# EAGLE board greenhousectrl-latest-expanded (EAGLE 7.7.0)
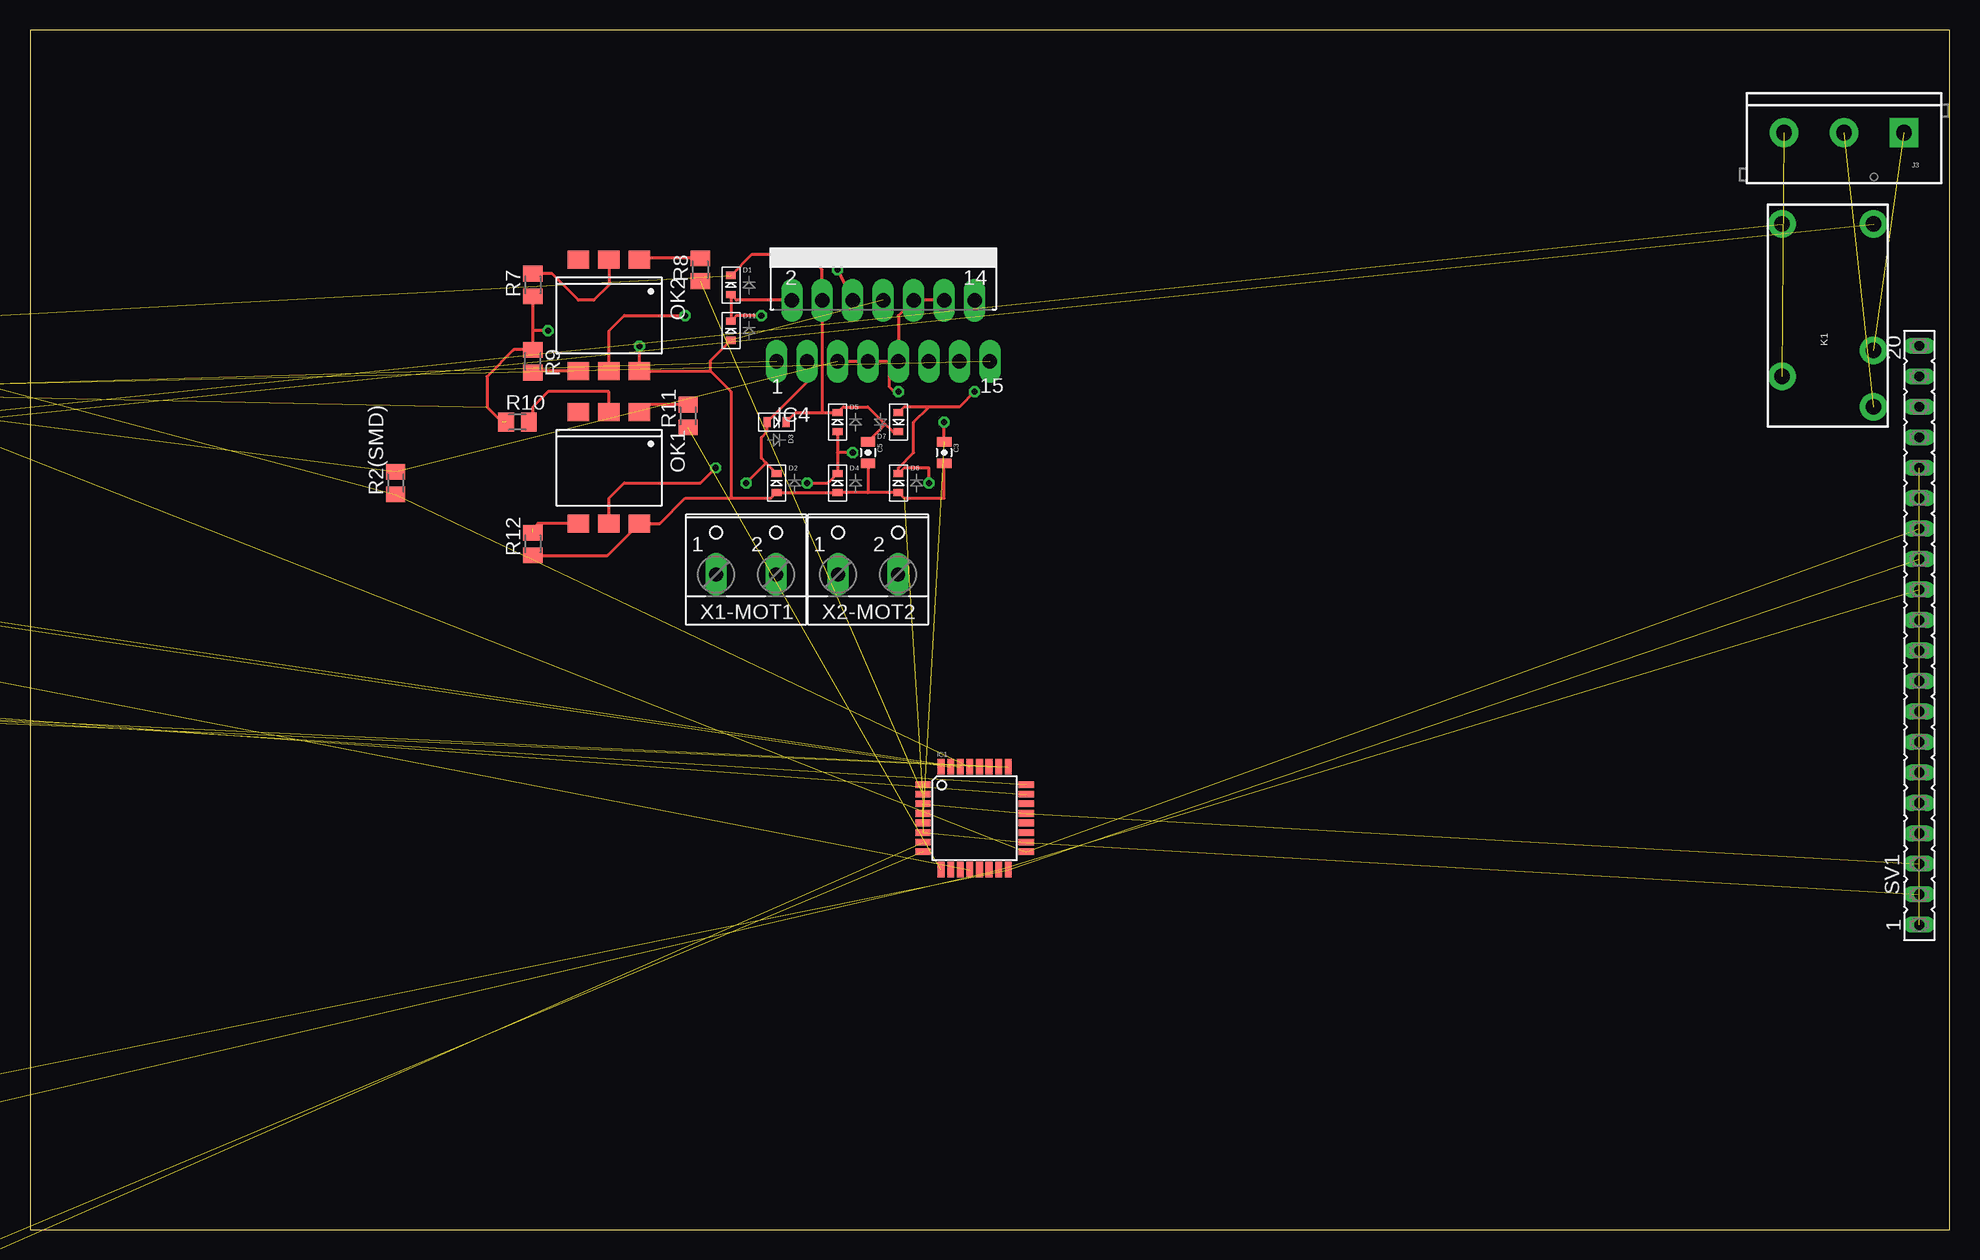
[diagram p0: board, top side]
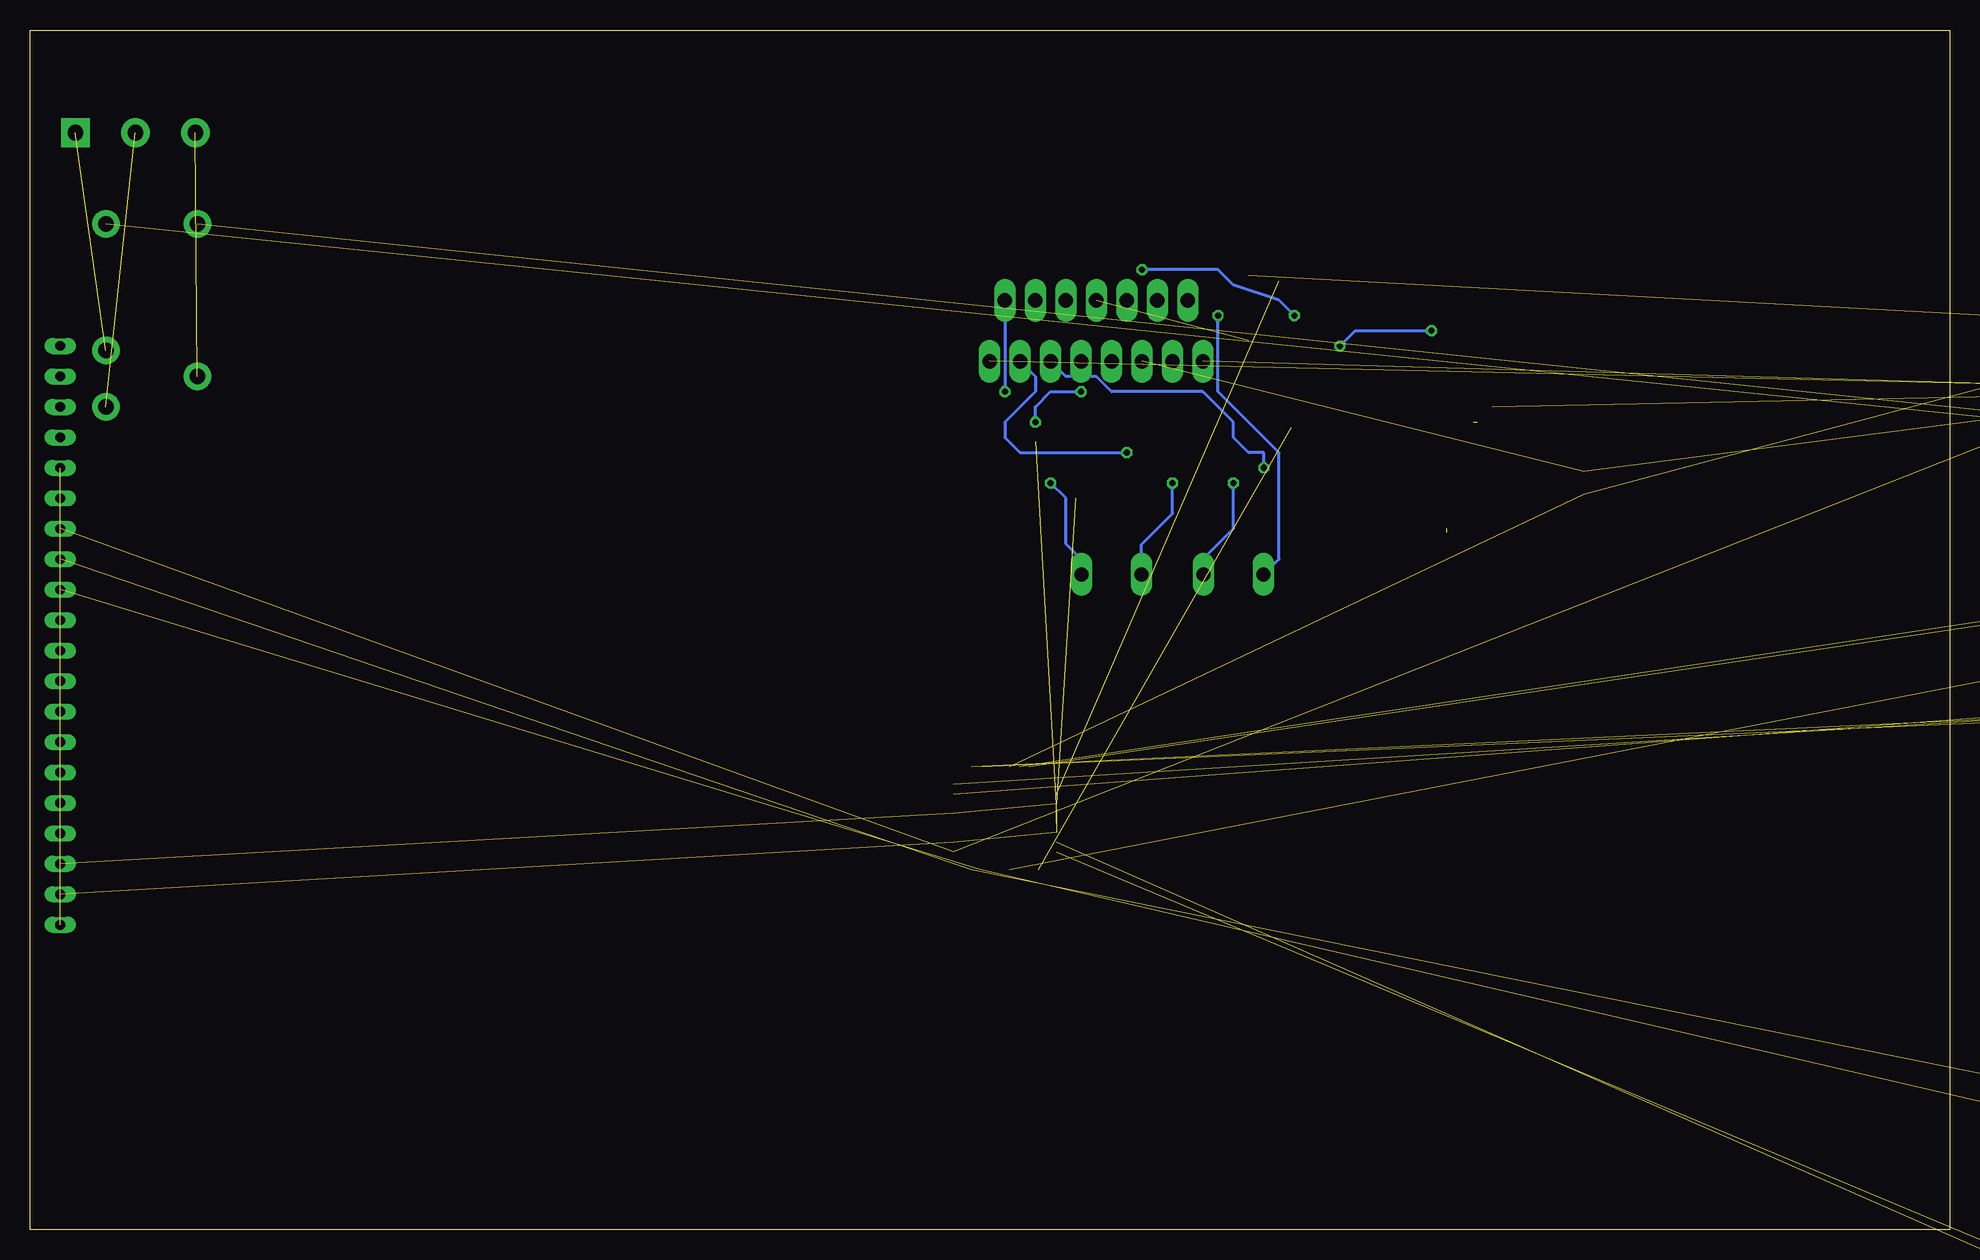
[diagram p1: board, bottom side, seen from below]

Size 160 x 100 mm. Coordinates in mm from the lower left corner, seen from the top.
Outline: 0,0 160,0 160,100 0,100 0,0
Copper layers (1*16): Top 0.035mm / dielectric 1.5mm / Bottom 0.035mm
Design rules "default": minimum track width 10mil, minimum drill 24mil, track to track 8mil, track to pad 8mil, pad to pad 8mil, via to via 8mil, smd to smd 8mil, copper to edge 40mil, drill to drill 8mil, minimum pad ring 10mil, minimum via ring 8mil, stop-mask expansion 4mil, vias tented up to drill 0mil, thermal gap 10mil

## Footprints (pad centres in the part's own frame; a part is rotated, then mirrored left to right if it is on the bottom)
C0805 = smd 1.3 x 1.5: 1 -0.95,0; 2 0.95,0
0805-CAP = smd 0.8 x 1.2: 1 -0.9,0; 2 0.9,0
0603-CAP = smd 1.1 x 1: 1 -0.85,0; 2 0.85,0
SOD-523 = smd 0.8 x 0.6: A 0,-0.8; K 0,0.8
SOD-323F = smd 1 x 0.8: A -1,0; C 1,0
06X1-PTH = drill 1.016 octagon: 1 -6.35,0; 2 -3.81,0; 3 -1.27,0; 4 1.27,0; 5 3.81,0; 6 6.35,0
TQFP32-08 = smd 1.27 x 0.559: 1 -4.293,2.8; 2 -4.293,2; 3 -4.293,1.2; 4 -4.293,0.4; 5 -4.293,-0.4; 6 -4.293,-1.2; 7 -4.293,-2; 8 -4.293,-2.8; 17 4.293,-2.8; 18 4.293,-2; 19 4.293,-1.2; 20 4.293,-0.4; 21 4.293,0.4; 22 4.293,1.2; 23 4.293,2; 24 4.293,2.8 | smd 0.559 x 1.27: 9 -2.8,-4.293; 10 -2,-4.293; 11 -1.2,-4.293; 12 -0.4,-4.293; 13 0.4,-4.293; 14 1.2,-4.293; 15 2,-4.293; 16 2.8,-4.293; 25 2.8,4.293; 26 2,4.293; 27 1.2,4.293; 28 0.4,4.293; 29 -0.4,4.293; 30 -1.2,4.293; 31 -2,4.293; 32 -2.8,4.293
MULTIWATT-15 = drill 1.2 long: 1 -8.89,-7.62; 2 -7.62,-2.54; 3 -6.35,-7.62; 4 -5.08,-2.54; 5 -3.81,-7.62; 6 -2.54,-2.54; 7 -1.27,-7.62; 8 0,-2.54; 9 1.27,-7.62; 10 2.54,-2.54; 11 3.81,-7.62; 12 5.08,-2.54; 13 6.35,-7.62; 14 7.62,-2.54; 15 8.89,-7.62
AVRISP = drill 0.9 pad 1.626: 1 -1.27,2.54; 2 1.27,2.54; 3 -1.27,0; 4 1.27,0; 5 -1.27,-2.54; 6 1.27,-2.54
POWER_JACK_PTH = drill 2.997 pad 4.318: GND 0,7.7; GNDBREAK 4.7,10.7; PWR 0,13.7
SCREWTERMINAL-5MM-3 = drill 1.3 pad 2.413 square: 1 0,0 | drill 1.3 pad 2.413: 2 5,0; 3 10,0
PAD-JUMPER-2-NO_YES_SILK = smd 0.635 x 1.27: 1 -0.45,0; 2 0.45,0
RELAY-JZC = drill 1.3 pad 2.286: 1 3.81,-8.89; 2 -3.81,1.651; 3 -3.81,6.35; 4 3.81,3.81; 5 -3.81,-8.89
SOT23 = smd 1 x 1.4: 1 -0.95,-1.1; 2 0.95,-1.1; 3 0,1.1
DIL6-SMD = smd 1.78 x 1.52: 1 -2.54,-4.645; 2 0,-4.645; 3 2.54,-4.645; 4 2.54,4.645; 5 0,4.645; 6 -2.54,4.645
SOT23-3 = smd 0.8 x 0.9: 1 -0.95,-1; 2 0.95,-1; 3 0,1.1
M0805 = smd 1.3 x 1.6: 1 -0.95,0; 2 0.95,0
0402-RES = smd 0.85 x 0.9: 1 -0.58,0; 2 0.58,0
03P = drill 0.914 long: 1 -2.54,0; 2 0,0; 3 2.54,0
FE20 = drill 0.813 long: 1 -24.13,0; 2 -21.59,0; 3 -19.05,0; 4 -16.51,0; 5 -13.97,0; 6 -11.43,0; 7 -8.89,0; 8 -6.35,0; 9 -3.81,0; 10 -1.27,0; 11 1.27,0; 12 3.81,0; 13 6.35,0; 14 8.89,0; 15 11.43,0; 16 13.97,0; 17 16.51,0; 18 19.05,0; 19 21.59,0; 20 24.13,0
BTN_CK_KSS = smd 1.7 x 3.7: P$1 -2.95,0; P$2 2.95,0
SOT223 = smd 1.219 x 2.235: 1 -2.311,-3.099; 2 0,-3.099; 3 2.311,-3.099 | smd 3.6 x 2.2: 4 0,3.099
HC49 = drill 0.813 pad 1.8: 1 -2.413,0; 2 2.413,0
W237-102 = drill 1.194 long: 1 -2.5,-1.27; 2 2.5,-1.27

## Placement (x,y rotation side)
C1  [C0805]  -68.58,-35.56 0 top  (outside the outline)
C2  [C0805]  -68.58,-40.64 0 top  (outside the outline)
C3  1.0uF  [0805-CAP]  76.2,64.77 270 top
C4  0.1uF  [0603-CAP]  -21.59,74.93 0 top  (outside the outline)
C5  1.0uF  [0805-CAP]  69.85,64.77 270 top
C6  0.1uF  [0603-CAP]  -25.4,74.93 0 top  (outside the outline)
C7  0.1uF  [0603-CAP]  -29.21,74.93 0 top  (outside the outline)
D1  [SOD-523]  58.42,78.74 0 top
D2  [SOD-523]  62.23,62.23 0 top
D3  [SOD-523]  62.23,67.31 270 top
D4  [SOD-523]  67.31,62.23 0 top
D5  [SOD-523]  67.31,67.31 0 top
D6  [SOD-523]  72.39,62.23 0 top
D7  [SOD-523]  72.39,67.31 180 top
D9  1N4148  [SOD-323F]  -20.32,66.04 0 top  (outside the outline)
D10  Zener  [SOD-323F]  -25.4,66.04 0 top  (outside the outline)
D11  [SOD-523]  58.42,74.93 0 top
FTDI-SERIAL-HEADER  HEADER-06X1-MALE  [06X1-PTH]  -24.13,53.34 0 top  (outside the outline)
IC1  ATMEGA168TQFP-08  [TQFP32-08]  78.74,34.29 0 top
IC4  L298  [MULTIWATT-15]  71.12,80.01 0 top
ICSP-PROG-HEADER  AVRISP-6  [AVRISP]  -27.94,5.08 0 top  (outside the outline)
J1  POWER_JACKPTH  [POWER_JACK_PTH]  -59.69,7.62 180 top  (outside the outline)
J3  [SCREWTERMINAL-5MM-3]  156.21,91.44 180 top
JP1  JUMPER-PAD-2-NOYES_SILK  [PAD-JUMPER-2-NO_YES_SILK]  -35.56,66.04 0 top  (outside the outline)
K1  RELAYPTH4  [RELAY-JZC]  149.86,74.93 180 top
LD1  PL006-WCR12  [SOT23]  -50.8,36.83 0 top  (outside the outline)
LD2  PL006-WCR12  [SOT23]  -63.5,36.83 0 top  (outside the outline)
LED1  PL006-WCR13  [SOT23]  -22.86,45.72 0 top  (outside the outline)
OK1  4N27SM  [DIL6-SMD]  48.26,63.5 180 top
OK2  4N27SM  [DIL6-SMD]  48.26,76.2 180 top
Q1  MMBT2222A  [SOT23-3]  -44.45,64.77 0 top  (outside the outline)
R1  [M0805]  -15.24,69.85 0 top  (outside the outline)
R2  [M0805]  -20.32,69.85 0 top  (outside the outline)
R2(SMD)  [M0805]  30.48,62.23 90 top
R3  1K  [M0805]  -43.18,53.34 0 top  (outside the outline)
R4  1K  [M0805]  -48.26,53.34 0 top  (outside the outline)
R5  [M0805]  -25.4,69.85 0 top  (outside the outline)
R6  [M0805]  -30.48,69.85 0 top  (outside the outline)
R7  [M0805]  41.91,78.74 90 top
R8  [M0805]  55.88,80.01 90 top
R9  [M0805]  41.91,72.39 270 top
R10  [M0805]  40.64,67.31 0 top
R11  [M0805]  54.86,67.82 90 top
R12  [M0805]  41.91,57.15 90 top
R13  [0402-RES]  -33.02,73.66 0 top  (outside the outline)
R14  [0402-RES]  -36.83,73.66 0 top  (outside the outline)
SL1  [03P]  -29.21,44.45 0 top  (outside the outline)
SL2  [03P]  -38.1,44.45 0 top  (outside the outline)
SL3  [03P]  -46.99,44.45 0 top  (outside the outline)
SL4  [03P]  -55.88,44.45 0 top  (outside the outline)
SV1  [FE20]  157.48,49.53 90 top
SW1  [BTN_CK_KSS]  -36.83,52.07 0 top  (outside the outline)
U2  V_REG_317SMD  [SOT223]  -49.53,24.13 0 top  (outside the outline)
X1  CRYSTALS-NOGND-HC49  [HC49]  -64.77,-27.94 0 top  (outside the outline)
X1-MOT1  [W237-102]  59.69,55.88 0 top
X2-MOT2  [W237-102]  69.85,55.88 0 top

## Library data of the parts
C1 C2 = resistor
C3 C5 = SparkFun-Capacitors; PROD_ID: CAP-11625
C4 C6 C7 = SparkFun-Capacitors; PROD_ID: CAP-00810
D1-D7 D10 D11 ICSP-PROG-HEADER R1 R2 R2(SMD) R3-R12 SW1 = adafruit
D9 = adafruit; PROD_ID: DIO-08378
FTDI-SERIAL-HEADER = GeekAmmo; OTHER: 4UCON 00834; URL: http://www.4uconnector.com/online/SearchPro.asp?FormName=ProSearch&FormAction=search&s_GroupNo=&s_keyword=00834
IC1 = atmega328p
IC4 = st-microelectronics; MPN: L298N; OC_FARNELL: 1589425; OC_NEWARK: 32M1527
J1 = SparkFun-Connectors; PROD_ID: CONN-08197
J3 = SparkFun-Connectors; PROD_ID: CONN-10134; STOREFRONT_ID: PRT-08433
JP1 = SparkFun-Passives
K1 = SparkFun-Electromechanical
LD1 LD2 = led
LED1 = led; PROD_ID: DIO-09529
OK1 OK2 = optocoupler; MF: FAIRCHILD SEMICONDUCTOR; MPN: 4N27S-M; OC_FARNELL: unknown; OC_NEWARK: 05C3300
Q1 = SparkFun-DiscreteSemi; PROD_ID: TRANS-08049
R13 R14 = SparkFun-Resistors
SL1-SL4 = con-amp-quick; OC_FARNELL: unknown; OC_NEWARK: unknown
SV1 = con-lsta; OC_FARNELL: unknown; OC_NEWARK: unknown
U2 = SparkFun-PowerIC
X1 = IQD-Frequency-Products
X1-MOT1 X2-MOT2 = con-wago-500; MPN: 237-102; OC_FARNELL: unknown; OC_NEWARK: 70K9898

## Nets
+5V: C3.1 C7.1 FTDI-SERIAL-HEADER.3 IC1.4 IC1.6 IC1.18 IC4.5 IC4.7 IC4.9 IC4.10 IC4.12 ICSP-PROG-HEADER.2 R2(SMD).2 R2.1 R14.2 SL1.2 SL2.2 SL3.2 SL4.2 SV1.2 SV1.15 U2.2
+12V: C5.1 C6.1 D1.K D3.K D5.K D7.K IC4.4 J1.PWR U2.3
ADC4: SV1.4
ADC5: SV1.5
COIL: D10.C JP1.1 K1.1 Q1.3 R4.1
COMMON: J3.3 K1.4
CTS(DOESNTEXIST): FTDI-SERIAL-HEADER.2
DIODENODE: D9.A D10.A JP1.2
DTR: C4.1 FTDI-SERIAL-HEADER.6
ENA: IC4.6 OK2.5
ENB: IC4.11 OK1.5
GND: C1.1 C2.1 C3.2 C5.2 C6.2 C7.2 D2.A D4.A D6.A D11.A FTDI-SERIAL-HEADER.1 IC1.3 IC1.5 IC1.21 IC4.8 ICSP-PROG-HEADER.6 J1.GND J1.GNDBREAK LD1.3 LD2.3 OK1.6 OK2.6 Q1.2 R5.2 R6.2 R7.1 R9.1 R10.1 R12.1 R13.1 SL1.1 SL2.1 SL3.1 SL4.1 SV1.1 SV1.3 SV1.16 SW1.P$2
MISO: IC1.16 ICSP-PROG-HEADER.1 SV1.13
MOSI: IC1.15 ICSP-PROG-HEADER.4 SV1.12
N$1: OK2.1 R8.2
N$2: LD2.1 R2.2
N$3: LED1.3 R4.2
N$4: OK2.2 R7.2
N$5: OK2.4 R9.2
N$6: Q1.1 R3.1
N$7: R13.2 R14.1 U2.1
N$8: OK1.1 R11.2
N$9: OK1.2 R10.2
N$10: LD1.1 R1.1
N$11: C1.2 IC1.7 X1.2
N$13: C2.2 IC1.8 X1.1
N$15: OK1.4 R12.2
NC: J3.1 K1.2
NO: J3.2 K1.3
OUT1: D1.A D11.K IC4.2 X1-MOT1.1
OUT2: D2.K D3.A IC4.3 X1-MOT1.2
OUT3: D4.K D5.A IC4.13 X2-MOT2.1
OUT4: D6.K D7.A IC4.14 X2-MOT2.2
PB0: IC1.12 R3.2
PB1: IC1.13
PB2: IC1.14
PC0: IC1.23 SL1.3
PC1: IC1.24 SL2.3
PC2: IC1.25 SL3.3
PC3: IC1.26 SL4.3
PC4: IC1.27
PC5: IC1.28
PD2: IC1.32
PD3: IC1.1
PD4: IC1.2 R8.1
PD5: IC1.9 R11.1
PD6: IC1.10
PD7: IC1.11
RST: C4.2 IC1.29 ICSP-PROG-HEADER.5 R2(SMD).1 SW1.P$1
RX: FTDI-SERIAL-HEADER.5 IC1.30
SCK: IC1.17 ICSP-PROG-HEADER.3 R1.2 SV1.14
SEN_A: IC4.1 R5.1
SEN_B: IC4.15 R6.1
SS: SV1.11
TX: FTDI-SERIAL-HEADER.4 IC1.31
VCC: D9.C K1.5 LED1.1

## Tracks (layer width: path | path; a pad name or v marks a point on that pad's centre or on a via)
+5V  (via drill 0.51)  (16 unrouted)
  Top 0.254: C3.1 v76.2,67.31 | v72.39,69.85 72.01,69.85 71.63,70.23 71.63,71.63 IC4.9 | IC4.9 72.39,76.2 IC4.10 IC4.12 | IC4.9 IC4.7 IC4.5
  Bottom 0.254: v76.2,67.31 76.2,68.58 74.93,69.85 v72.39,69.85
+12V  (3 unrouted)
  Top 0.254: D1.K 60.16,81.28 64.77,81.28 66.04,80.01 IC4.4 66.04,68.11 | D3.K 63.83,68.11 66.04,68.11 | 66.04,68.11 D5.K 67.78,68.58 69.85,68.58 71.12,67.31 | 71.12,67.31 71.92,66.51 D7.K | C5.1 71.12,66.94 71.12,67.31
COIL  (4 unrouted)
COMMON  (1 unrouted)
DIODENODE  (2 unrouted)
DTR  (1 unrouted)
ENA  (via drill 0.51)
  Top 0.254: OK2.5 48.26,74.93 49.53,76.2 v54.61,76.2 | v67.31,80.01 IC4.6
  Bottom 0.254: v54.61,76.2 55.88,77.47 59.69,78.74 60.96,80.01 v67.31,80.01
ENB  (via drill 0.51)
  Top 0.254: OK1.5 48.26,60.96 49.53,62.23 55.88,62.23 v57.15,63.5
  Bottom 0.254: v57.15,63.5 57.15,64.77 58.42,64.77 59.69,66.04 59.69,67.31 62.23,69.85 69.85,69.85 71.12,71.12 73.66,71.12 IC4.11
GND  (via drill 0.51)  (27 unrouted)
  Top 0.254: R7.1 41.91,74.93 | 41.91,74.93 R9.1 40.32,73.34 38.1,71.12 38.1,68.58 39.37,67.31 | 69.85,61.43 D6.A 72.86,60.96 76.2,60.96 C3.2 | 69.85,61.43 D4.A D2.A 61.76,60.96 58.42,60.96 | R12.1 48.15,56.2 OK1.6 52.51,58.85 54.61,60.96 58.42,60.96 | 56.72,71.56 OK2.6 v50.8,73.66 | 56.72,71.56 58.42,69.85 58.42,60.96 | 56.72,71.56 56.72,72.42 D11.A | C5.2 69.85,61.43 | v43.18,74.93 41.91,74.93
  Bottom 0.254: v50.8,73.66 49.53,74.93 v43.18,74.93
MISO  (2 unrouted)
MOSI  (2 unrouted)
N$1
  Top 0.254: R8.2 50.91,80.96 OK2.1
N$2  (1 unrouted)
N$3  (1 unrouted)
N$4
  Top 0.254: OK2.2 48.26,78.74 46.99,77.47 45.72,77.47 43.5,79.69 R7.2
N$5
  Top 0.254: OK2.4 42.02,71.56 R9.2
N$6  (1 unrouted)
N$7  (2 unrouted)
N$8
  Top 0.254: R11.2 51.42,68.77 OK1.1
N$9
  Top 0.254: OK1.2 48.26,69.85 43.18,69.85 41.91,68.58 41.91,67.63 R10.2
N$10  (1 unrouted)
N$11  (2 unrouted)
N$13  (2 unrouted)
N$15  (1 unrouted)
  Top 0.254: OK1.4 42.34,58.85 41.91,58.42
NC  (1 unrouted)
NO  (1 unrouted)
OUT1  (via drill 0.51)
  Top 0.254: IC4.2 58.89,77.47 D1.A D11.K 58.89,76.2 v60.96,76.2
  Bottom 0.254: X1-MOT1.1 57.15,54.61 55.88,55.88 55.88,64.77 60.96,69.85 v60.96,76.2
OUT2  (via drill 0.51)
  Top 0.254: IC4.3 64.77,70.65 D3.A 61.43,66.51 60.96,66.04 60.96,64.3 61.36,63.9 | D2.K 61.36,63.9 | v59.69,62.23 61.36,63.9
  Bottom 0.254: X1-MOT1.2 62.19,55.92 59.69,58.42 v59.69,62.23
OUT3  (via drill 0.51)
  Top 0.254: D5.A 67.31,64.77 | 67.31,64.77 D4.K 66.51,62.23 v64.77,62.23 | v68.58,64.77 67.31,64.77
  Bottom 0.254: X2-MOT2.1 67.35,57.11 64.77,59.69 v64.77,62.23 | IC4.13 76.2,71.12 76.2,69.85 78.74,67.31 78.74,66.04 77.47,64.77 v68.58,64.77
OUT4  (via drill 0.51)
  Top 0.254: v78.74,69.85 77.47,68.58 74.93,68.58 | 74.93,68.58 72.86,68.58 D7.A | 74.93,68.58 73.66,67.31 73.66,64.77 72.39,63.5 D6.K 72.86,63.5 74.93,63.5 v74.93,62.23
  Bottom 0.254: IC4.14 v78.74,69.85 | X2-MOT2.2 72.35,55.84 73.66,57.15 73.66,60.96 v74.93,62.23
PB0  (1 unrouted)
PC0  (1 unrouted)
PC1  (1 unrouted)
PC2  (1 unrouted)
PC3  (1 unrouted)
PD4  (1 unrouted)
PD5  (1 unrouted)
RST  (4 unrouted)
RX  (1 unrouted)
SCK  (3 unrouted)
SEN_A  (1 unrouted)
SEN_B  (1 unrouted)
TX  (1 unrouted)
VCC  (2 unrouted)